# Altium PCB AIWAC-Camera Pinboard-V02.PcbDoc
Units mm, origin at the board's own origin, x right, y up, seen from the top; angles counter-clockwise.
Board outline 20.2 x 22.2 mm, 2 copper layers (Top Layer, Bottom Layer); 9 components, 21 nets, 65 pads, 39 vias.
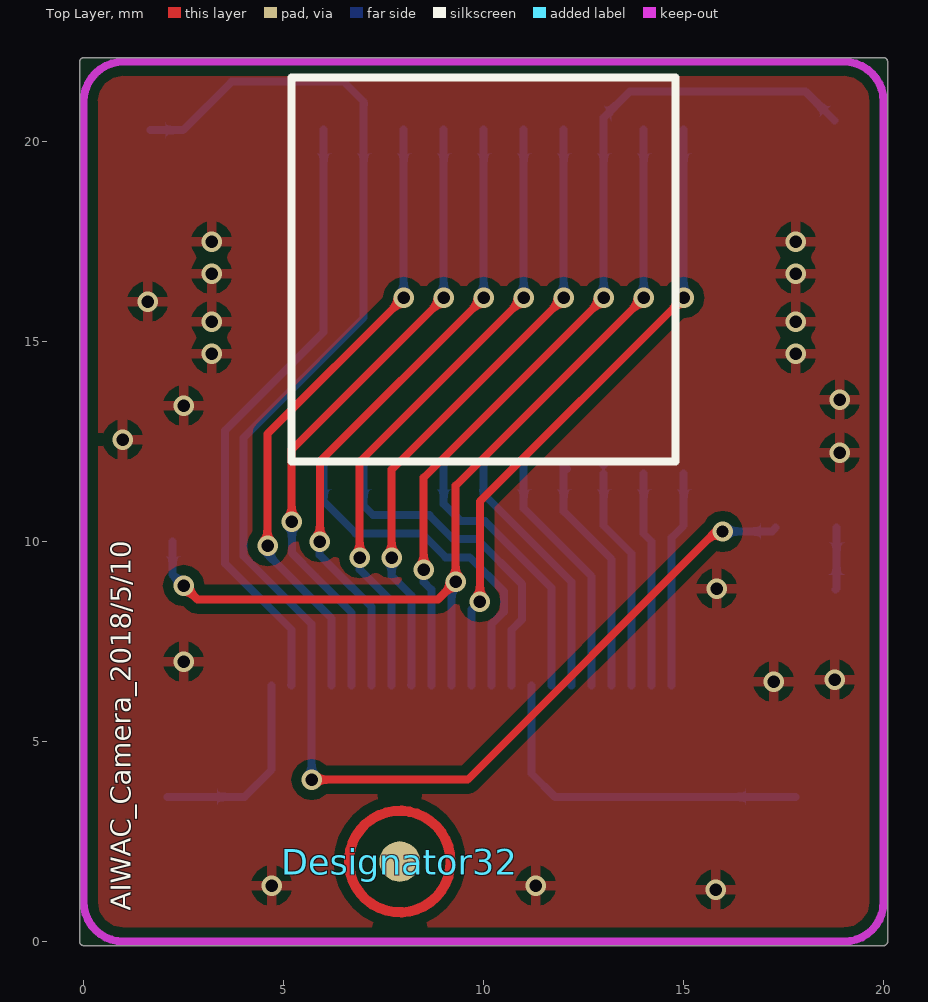
[diagram p0: Top Layer view]
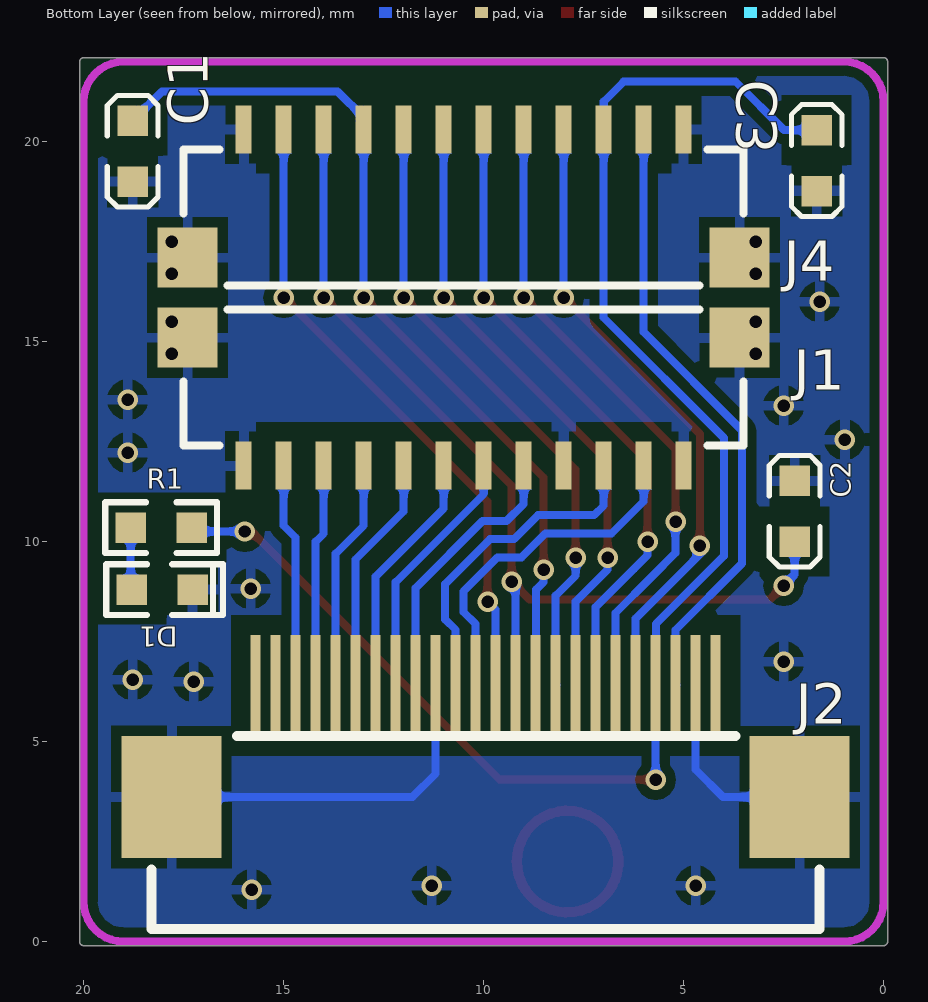
[diagram p1: Bottom Layer view, seen from below]
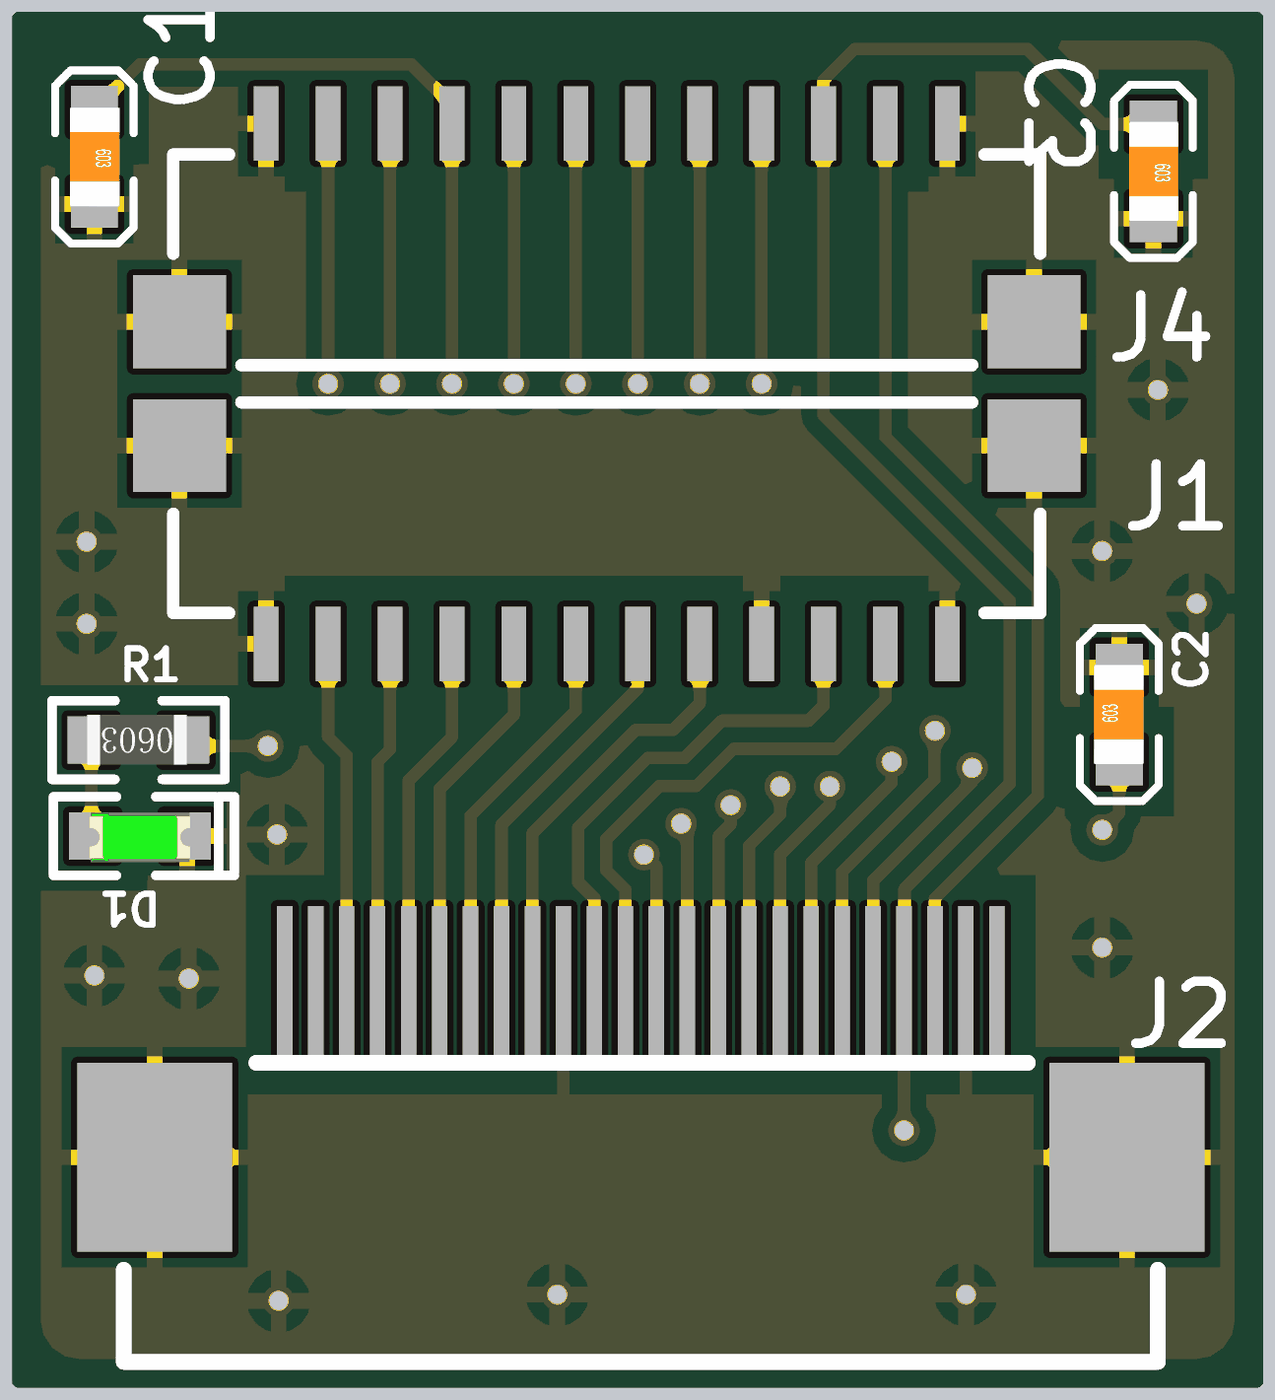
[diagram p2: 3D render of the assembled board from below, using the file's embedded part models]

## Layer stack, top to bottom
Top Solder: solder mask 0.0102, Solder Resist, Dk 3.5
Top Layer: signal copper 0.0356
Dielectric 1: dielectric 0.32, FR-4, Dk 4.8
Bottom Layer: signal copper 0.0356
Bottom Solder: solder mask 0.0102, Solder Resist, Dk 3.5

## Board outline
-0.1,0 ccw(c0,0) 0,-0.1 20,-0.1 ccw(c20,0) 20.1,0 20.1,22 ccw(c20,22) 20,22.1 0,22.1 ccw(c0,22) -0.1,22

## Design rules (kind name [scope] priority, off if disabled: settings)
Clearance [InNamedPolygon('GND_L02_P002')] p1: gap=0.254 except(0.2: SMDPad-SMDPad; 0.5: SMDPad-Poly)
Clearance Clearance_1 [All] p2: gap=0.254 except(0.2: SMDPad-SMDPad)
ComponentClearance [All] p1: gap=0.1 collisioncheckmode=3 verticalgap=0.1 showdistances=FALSE
HoleToHoleClearance [All] p1: gap=0.1 allowstackedmicrovias=TRUE
MinimumSolderMaskSliver [All] p1: minsoldermaskwidth=0.01
PolygonConnect [All] p1: connectstyle=Relief reliefconductorwidth=0.254 reliefentries=4 polygonreliefangle="90 Angle" airgapwidth=0.254
RoutingVias [All] p1: holewidth=0.711 width=1.27 viastyle="Through Hole" minholewidth=0.254 minwidth=0.508 maxholewidth=0.711 maxwidth=1.27
SilkToSilkClearance [All] p1: silktosilkclearance=0.01
SilkToSolderMaskClearance [IsPad] p1: minsilkscreentomaskgap=0 clearancetoexposedcopper=TRUE
SolderMaskExpansion [All] p1: expansion=0.102
Width [All] p1: maxlimit=1 minlimit=0.2 preferedwidth=0.254
25 further rules are at their usual default settings.

## Components (designator, comment, footprint, x,y, rotation, side; value= is the part's Value field where it differs from the comment)
C1 "105K16V" C0603 18.775,20.524 r270 bottom locked
C2 "105K16V" C0603 2.225,10 r90 bottom locked
C3 "105K16V" C0603 1.673,20.289 r270 bottom locked
D1 "LED0603G" D-LED0603G 18.8,8.8 r180 bottom locked
Designator32 "Comment" MarkGlobal1 7.9,2 r0 top
J1 "SH1.0-T-1-LT-12A" J-SH1.0-T-1-LT-12A 16,11.9 r180 bottom locked
J2 "FPC0.5-24P/UT" FPC0.5-24P/UT 4.2,6.4 r0 bottom locked
J4 "SH1.0-T-1-LT-12A" J-SH1.0-T-1-LT-12A 5,20.3 r0 bottom locked
R1 "2KF" R0603 17.3,10.35 r0 bottom locked

## Footprints (in the part's own frame and the unit in brackets; to place one, negate y for a bottom-side part, rotate by r counter-clockwise, add the part's x,y. Pads: shape width x height; smd on the part's side, far side on the other; paste and mask are expansions set on the pad)
C0603 [mil]
  rect 30x30 smd: 1(0,0) 2(60,0)
  silkscreen extent -25,-25 85,25, body extent -1,-15 61,16, height 12
D-LED0603G [mil]
  rect 30x30 smd: 1(0,0) 2(60,0)
  silkscreen extent -25,-25 90,25, body extent -2,-16 62,15, height 24
FPC0.5-24P/UT [mm]
  rect 0.25x2.54 smd: 1(0,0) 2(0.5,0) 3(1,0) 4(1.5,0) 5(2,0) 6(2.5,0) 7(3,0) 8(3.5,0) 9(4,0) 10(4.5,0) 11(5,0) 12(5.5,0) 13(6,0) 14(6.5,0) 15(7,0) 16(7.5,0) 17(8,0) 18(8.5,0) 19(9,0) 20(9.5,0) 21(10,0) 22(10.5,0) 23(11,0) 24(11.5,0)
  rect 2.5x3.048 smd: 25(-2.1,2.783) 26(13.6,2.783)
  silkscreen extent -2.6,1.26 14.1,6.09
J-SH1.0-T-1-LT-12A [mm]
  rect 0.4x1.2 smd: 1(0,0) 2(1,0) 3(2,0) 4(3,0) 5(4,0) 6(5,0) 7(6,0) 8(7,0) 9(8,0) 10(9,0) 11(10,0) 12(11,0)
  rect 1.5x1.5 smd: 13(-1.4,3.2) 14(12.4,3.2)
  silkscreen extent -1.5,0.5 12.5,3.9
MarkGlobal1 [mil]
  round 40 smd: 0(0.1,0.1)
  Top Layer circle w10: c0.1,0.1 r50
R0603 [mil]
  rect 30x30 smd: 1(0,0) 2(60,0)
  silkscreen extent -25,-25 85,25, body extent 0,-16 62,15, height 18

## Part data
C1 C2 C3: library part C0603X7R-105K16V, "贴片电容-陶瓷"
D1: library part DLED-0603-G, "贴片二极管-LED"
J1 J4: "接插件-SH1.0-T-1-LT-12A"
J2: library part J-FPC0.5-24P/UT, "FPC端子"
R1: library part R0603-2KF, "贴片电阻-通用"

## Via types
v1: diameter 0.508, hole 0.305, Top Layer to Bottom Layer, tented both sides, 39 vias

## Nets (pads, with @x,y where several pads share a name; then routed paths per layer and width w, separated by ;. In a path a pad name is that pad's centre, name@x,y a point inside that pad or via, vN(x,y) a via of type N, cw(c..) or ccw(c..) an arc to the next point about the centre after c; other vN are vias at no path point)
AVDD-CSI: C3.1 J2.4 J4.3 R1.1 | length 39.1
  Top Layer w0.2: v1(5.7,4.05) 9.6,4.05 15.804,10.254 v1(15.974,10.254)
  Bottom Layer w0.2: C3.1 2.489,20.289 3.7,21.5 6.5,21.5 7,21 J4.3 7,15.6 3.992,12.592 3.992,9.646 5.692,7.946 5.692,6.408 J2.4 v1(5.7,4.05) ; v1(15.974,10.254) 17.204,10.254 R1.1
DOVDD-CSI: C2.1 J2.11 J4.10 | length 24.2
  Top Layer w0.2: v1(2.5,8.9) 2.843,8.557 8.857,8.557 v1(9.3,9) 9.3,11.4 v1(14,16.1)
  Bottom Layer w0.2: C2.1 2.225,9.175 v1(2.5,8.9) ; J2.11 9.2,8.9 v1(9.3,9) ; v1(14,16.1) J4.10
DVDD1V8-CSI: C1.1 J2.10 J4.9 | length 22.5
  Top Layer w0.2: v1(8.5,9.3) 8.5,11.6 v1(13,16.1)
  Bottom Layer w0.2: v1(8.5,9.3) 8.5,8.99 8.692,8.798 8.692,6.408 J2.10 ; v1(13,16.1) J4.9 13,20.601 13.653,21.254 18.045,21.254 C1.1
GND: C1.2 C2.2 C3.2 D1.2 J1.1 J1.9 J1.12 J1.13 J1.14 J2.2 J2.15 J2.25 J2.26 J4.1 J4.12 J4.13 J4.14 | length 14
  Bottom Layer w0.2: J2.25 4.017,3.617 4.7,4.3 J2.2 ; J2.15 11.2,4.2 11.783,3.617 J2.26
  other v1: 15.8,1.3 4.7,1.4 11.3,1.4 17.25,6.5 18.775,6.55 2.5,7 15.825,8.825 18.9,12.225 0.975,12.55 2.5,13.4 18.9,13.55 3.2,14.7 17.8,14.7 3.2,15.5 17.8,15.5 1.6,16 3.2,16.7 17.8,16.7 3.2,17.5 17.8,17.5
NetD1_1: D1.1 R1.2 | length 1.6
  Bottom Layer w0.2: D1.1 18.824,8.824 R1.2
PE0_CSI-PCLK: J1.7 J2.17 | length 6.4
  Bottom Layer w0.2: J1.7 10,11.186 12.2,8.986 J2.17
PE1_CSI-MCLK: J1.11 J2.13 | length 8.8
  Bottom Layer w0.2: J1.11 6,11.008 6.8,10.208 8.452,10.208 9.052,9.608 9.652,9.608 10.508,8.752 10.508,8.246 10.2,7.938 J2.13
PE2_CSI-HSYNC: J2.9 J4.8 | length 15.9
  Top Layer w0.2: v1(7.7,9.6) 7.7,11.8 v1(12,16.1)
  Bottom Layer w0.2: v1(7.7,9.6) 7.7,9.148 8.2,8.648 J2.9 J2.9@8.179,6.421 ; v1(12,16.1) J4.8
PE3_CSI-VSYNC: J2.7 J4.6 | length 16
  Top Layer w0.2: v1@5.908,10.1 5.908,12.008 v1(10,16.1)
  Bottom Layer w0.2: v1(5.9,10) 5.9,9.664 6.246,9.318 7.2,8.364 J2.7 ; v1(10,16.1) J4.6
PE4_CSI-D0: J1.5 J2.19 | length 6.1
  Bottom Layer w0.2: J1.5@12.078,11.822 J1.5 12,10.758 13.2,9.558 J2.19
PE5_CSI-D1: J1.3 J2.21 | length 5.4
  Bottom Layer w0.2: J1.3@14,11.7 14,10.2 14.2,10 J2.21
PE6_CSI-D2: J1.2 J2.22 | length 5.4
  Bottom Layer w0.2: J2.22 14.7,10.1 15,10.4 J1.2@15,11.7
PE7_CSI-D3: J1.4 J2.20 | length 5.6
  Bottom Layer w0.2: J1.4@13,11.7 13,10.4 13.7,9.7 J2.20
PE8_CSI-D4: J1.6 J2.18 | length 6.2
  Bottom Layer w0.2: J1.6 11,10.828 12.7,9.128 J2.18
PE9_CSI-D5: J1.8 J2.16 | length 7
  Bottom Layer w0.2: J1.8 9,10.944 9.428,10.516 10.028,10.516 11.7,8.844 J2.16
PE10_CSI-D6: J1.10 J2.14 | length 8.4
  Bottom Layer w0.2: J1.10 7,10.9 7.238,10.662 8.64,10.662 9.24,10.062 9.84,10.062 10.962,8.94 10.962,8.058 10.7,7.796 J2.14
PE11_CSI-D7: J2.12 J4.11 | length 16.1
  Top Layer w0.2: v1(9.9,8.5) 9.908,8.508 9.908,11.008 v1(15,16.1)
  Bottom Layer w0.2: J2.12 9.7,8.3 v1(9.9,8.5) ; v1(15,16.1) 15,18.2 J4.11
PE12_CSI-SCK: J2.5 J4.4 | length 16
  Top Layer w0.2: v1(4.6,9.9) 4.592,9.908 4.592,12.692 v1(8,16.1)
  Bottom Layer w0.2: v1(4.6,9.9) 4.6,9.68 6.2,8.08 J2.5 ; v1(8,16.1) J4.4
PE13_CSI-SDA: J2.3 J4.2 | length 15.6
  Bottom Layer w0.2: J2.3@5.179,6.421 J2.3 5.2,7.796 3.538,9.458 3.538,12.78 6,15.242 J4.2
PE16_CSI-RST-F: J2.6 J4.5 | length 16.1
  Top Layer w0.2: v1(5.2,10.5) 5.2,12.3 v1(9,16.1)
  Bottom Layer w0.2: v1(5.2,10.5) 5.208,10.492 5.208,9.714 5.792,9.13 6.7,8.222 J2.6 ; v1(9,16.1) J4.5
PE17_CSI-STBY-F: J2.8 J4.7 | length 15.9
  Top Layer w0.2: v1(6.9,9.6) 6.9,12 v1(11,16.1)
  Bottom Layer w0.2: v1(6.9,9.6) 6.9,9.306 7.7,8.506 J2.8 ; v1(11,16.1) J4.7
pads on no net: Designator32.0 J2.1 J2.23 J2.24

## Polygon pours and split planes (outlines as drawn)
GND on Top Layer "GND_L01_P000" (solid, remove dead copper, pour order 0): 20,0.1 20,22 0,22 0,0 20,0 20,0.1
GND on Bottom Layer "GND_L02_P002" (solid, remove dead copper, pour order 2): 20,0.1 20,22 0,22 0,0 20,0 20,0.1

## Keep-outs
Keep-Out Layer:
  lines w0.2: 0,1 ccw(c1,1) 1,0 19,0 ccw(c19,1) 20,1 20,21 ccw(c19,21) 19,22 1,22 ccw(c1,21) 0,21 0,1

## Silkscreen, mask and mechanical layers (free items; w line width, h text height)
Top Overlay:
  lines w0.2: 5.2,12 5.2,21.6 14.8,21.6 14.8,12 5.2,12
  text "AIWAC_Camera_2018/5/10" at 1.175,0.775 h0.5 r90
Mechanical 1:
  lines w0.2: 0,1 ccw(c1,1) 1,0 19,0 ccw(c19,1) 20,1 20,21 ccw(c19,21) 19,22 1,22 ccw(c1,21) 0,21 0,1